# EAGLE board 5vBuckV1 (EAGLE 7.6.0)

Size 160 x 100 mm. Coordinates in mm from the lower left corner, seen from the top.
Outline: 0,0 160,0 160,100 0,100 0,0
Copper layers (1*16): Top 0.035mm / dielectric 1.5mm / Bottom 0.035mm
Design rules "default": minimum track width 10mil, minimum drill 24mil, track to track 8mil, track to pad 8mil, pad to pad 8mil, via to via 8mil, smd to smd 8mil, copper to edge 40mil, drill to drill 8mil, minimum pad ring 10mil, minimum via ring 8mil, stop-mask expansion 4mil, vias tented up to drill 0mil, thermal gap 10mil

## Footprints (pad centres in the part's own frame; a part is rotated, then mirrored left to right if it is on the bottom)
NIPPON_F80 = smd 2.95 x 1: + 2.4,0; - -2.4,0
0805-CAP = smd 0.8 x 1.2: 1 -0.9,0; 2 0.9,0
SOD-123 = smd 1.4 x 0.7: ANODE 0,0; CATHODE 3.3,0
SOIC-8 = smd 1.575 x 0.508: P$1 0,3.81; P$2 0,2.54; P$3 0,1.27; P$4 0,0; P$5 5.334,0; P$6 5.334,1.27; P$7 5.334,2.54; P$8 5.334,3.81
4PIN_.1' = drill 0.991 square: P$1 -3.81,0 | drill 0.991: P$2 -1.27,0; P$3 1.27,0; P$4 3.81,0
6X6MM_IND = smd 1.905 x 6.35: P$1 -2.413,0; P$2 2.413,0
0805 = smd 0.8 x 1.2: 1 -0.9,0; 2 0.9,0

## Placement (x,y rotation side)
C1  [NIPPON_F80]  -17.78,12.7 0 top  (outside the outline)
C2  .1uF  [0805-CAP]  -22.86,24.13 0 top  (outside the outline)
C3  1uF  [0805-CAP]  -26.67,24.13 0 top  (outside the outline)
C4  22uF  [0805-CAP]  -30.48,24.13 0 top  (outside the outline)
C5  1uF  [0805-CAP]  -15.24,27.94 0 top  (outside the outline)
D1  DIODE_SCHOTTKYSOD-123  [SOD-123]  -29.21,17.78 0 top  (outside the outline)
IC1  [SOIC-8]  -19.05,1.27 0 top  (outside the outline)
J1  CONNECTOR_4PIN  [4PIN_.1']  -19.05,19.05 0 top  (outside the outline)
L1  220uH  [6X6MM_IND]  -24.13,5.08 0 top  (outside the outline)
R1  220k  [0805]  -15.24,24.13 0 top  (outside the outline)
R2  670k  [0805]  -19.05,24.13 0 top  (outside the outline)

## Library data of the parts
C1 = SparkFun-Capacitors
C2-C5 = SparkFun-Capacitors; PROD_ID: CAP-08469
D1 IC1 J1 L1 = lolomolo
R1 R2 = SparkFun-Resistors; PROD_ID: RES-09883